# Altium PCB 000169(Quick_Fire_TK_USBC).PcbDoc
Units mm, origin at the board's own origin, x right, y up, seen from the top; angles counter-clockwise.
Board outline 42 x 17.54 mm, 2 copper layers (Top Layer, Bottom Layer), stack 1.571 mm thick; 15 components, 11 nets, 47 pads, 34 vias.
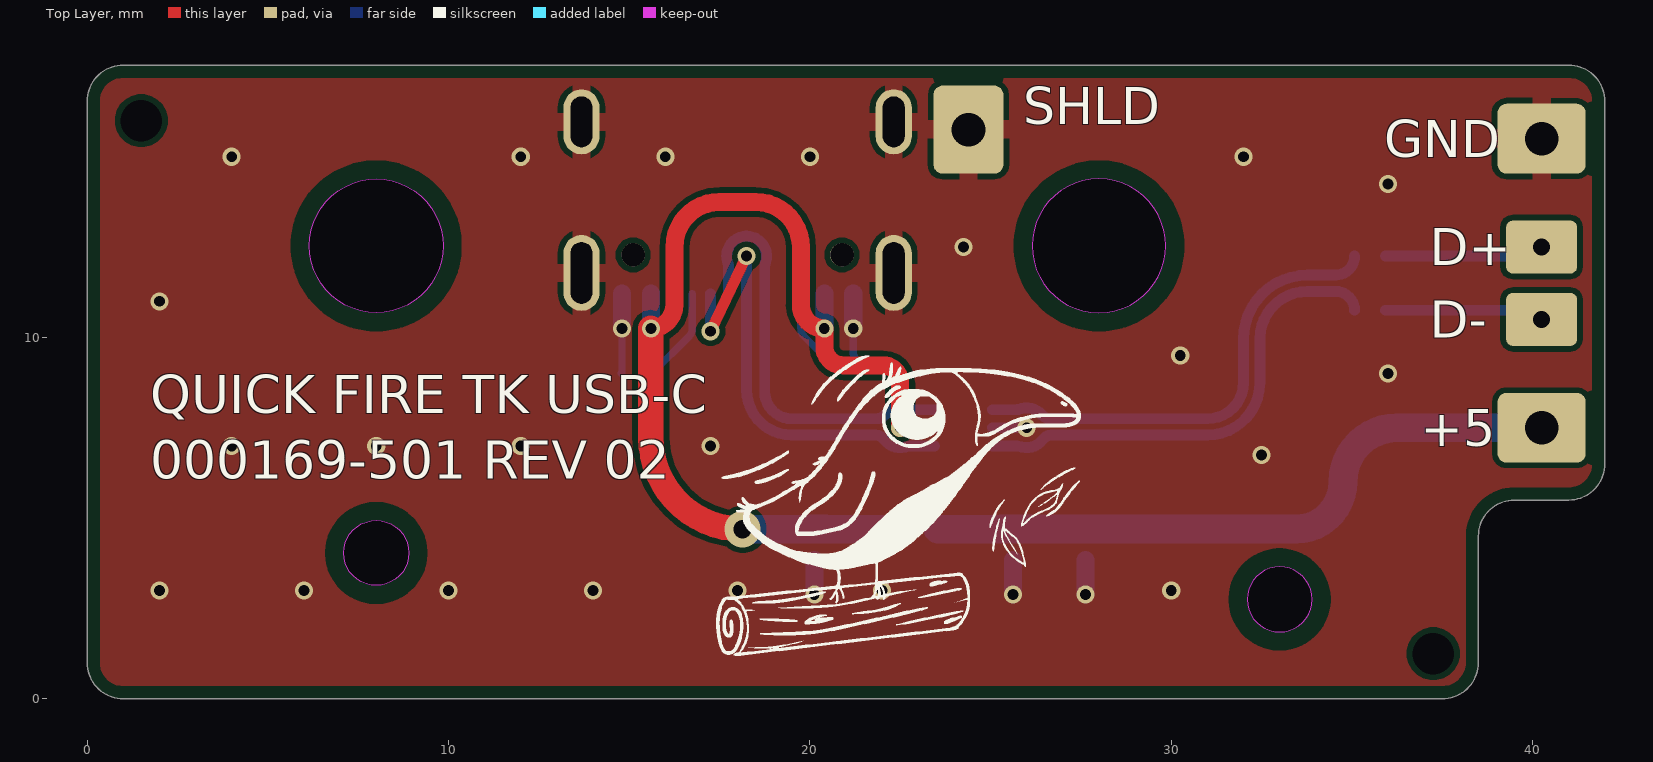
[diagram p0: Top Layer view]
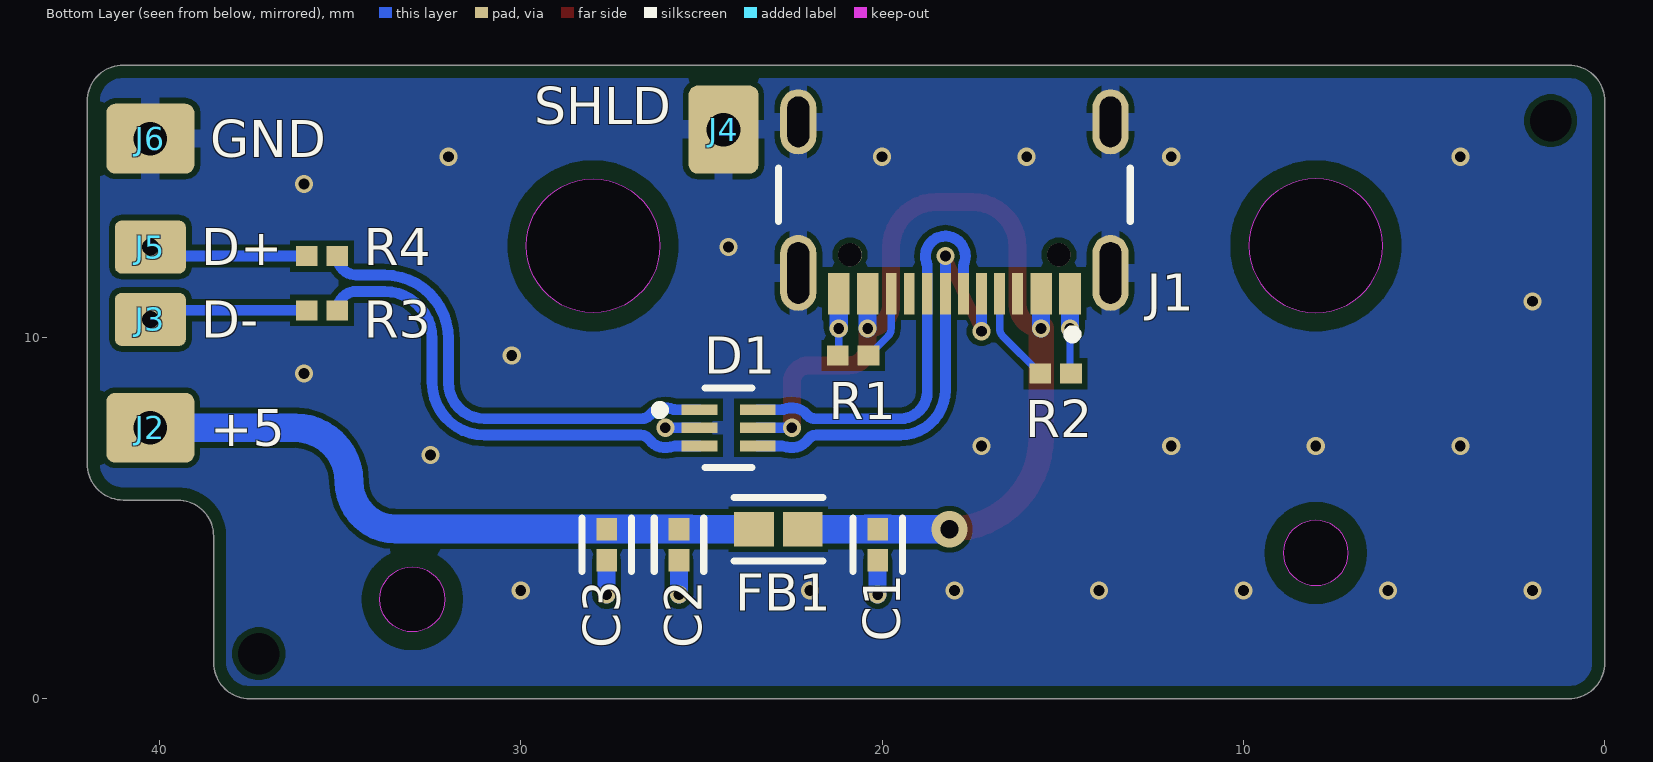
[diagram p1: Bottom Layer view, seen from below]
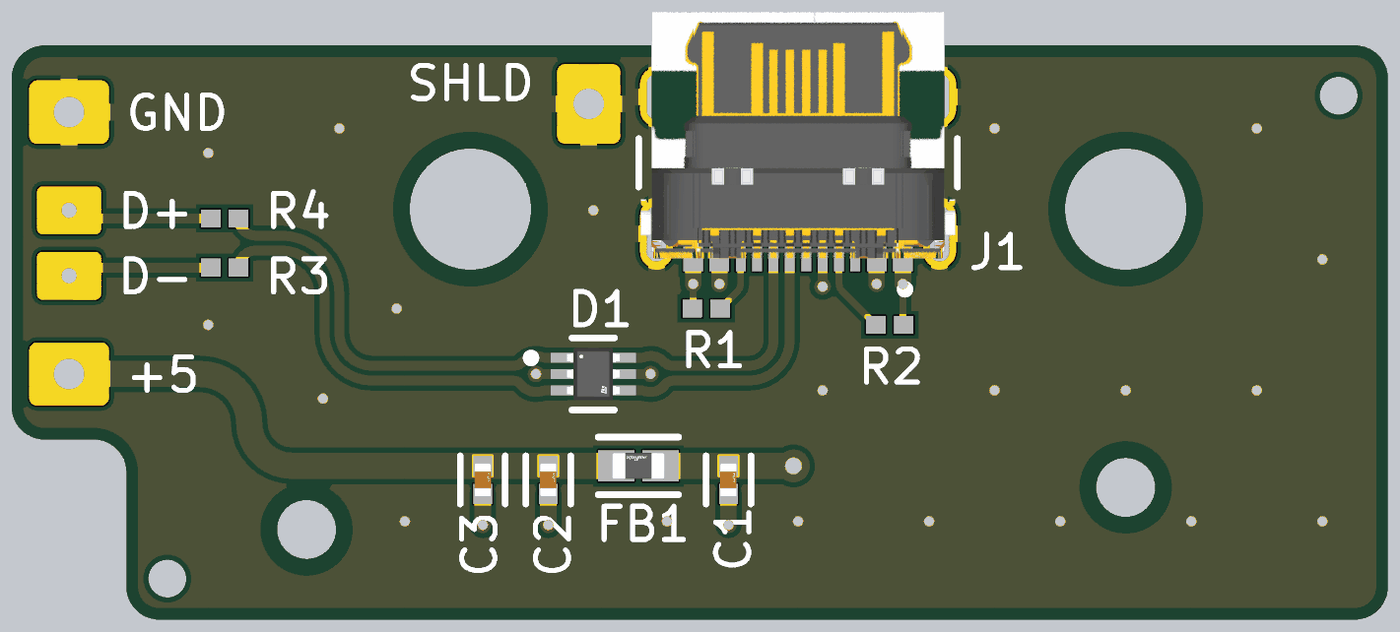
[diagram p2: 3D render of the assembled board from below, using the file's embedded part models]

## Layer stack, top to bottom
Top Solder: solder mask 0.0102, Solder Resist, Dk 3.5
Top Layer: signal copper 0.0356
Dielectric 1: dielectric 1.5, FR-4, Dk 4.5
Bottom Layer: signal copper 0.0356
Bottom Solder: solder mask 0.0102, Solder Resist, Dk 3.5

## Board outline
1,0 cw(c1,1) 0,1 0,16.535 cw(c1,16.535) 1,17.535 41,17.535 cw(c41,16.535) 42,16.535 42,6.5 cw(c41,6.5) 41,5.5 39.5,5.5 ccw(c39.5,4.5) 38.5,4.5 38.5,1 cw(c37.5,1) 37.5,0
cut-out: 32.1,2.75 ccw(c33,2.75) 33,1.85 ccw(c33,2.75) 33.9,2.75 ccw(c33,2.75) 33,3.65 ccw(c33,2.75)
cut-out: 8,3.135 cw(c8,4.035) 7.1,4.035 cw(c8,4.035) 8,4.935 cw(c8,4.035) 8.9,4.035 cw(c8,4.035)
cut-out: 26.15,12.535 ccw(c28,12.535) 28,10.685 ccw(c28,12.535) 29.85,12.535 ccw(c28,12.535) 28,14.385 ccw(c28,12.535)
cut-out: 8,10.685 cw(c8,12.535) 6.15,12.535 cw(c8,12.535) 8,14.385 cw(c8,12.535) 9.85,12.535 cw(c8,12.535)

## Design rules (kind name [scope] priority, off if disabled: settings)
BoardOutlineClearance [All] p1: gap=0.35 ignorepadtopadclearanceinfootprint=FALSE except(0.5: Arc-CutoutEdge Track-CutoutEdge SMDPad-CutoutEdge THPad-CutoutEdge Via-CutoutEdge Fill-CutoutEdge Poly-CutoutEdge Region-CutoutEdge Text-CutoutEdge)
Clearance Clearance_DP [All vs InNetClass('DP90')] p1: gap=0.152 ignorepadtopadclearanceinfootprint=TRUE
Clearance [All] p2: gap=0.152 ignorepadtopadclearanceinfootprint=FALSE
DiffPairsRouting [All] p1: maxlimit=0.152 minlimit=0.152 mostfreqgap=0.152 toplayer_minwidth=0.3 toplayer_maxwidth=0.3 toplayer_prefwidth=0.3 bottomlayer_minwidth=0.3 bottomlayer_maxwidth=0.3 bottomlayer_prefwidth=0.3 impedanceprofiledriven=TRUE impedanceprofileid={837F06F9-9FC5-4697-94FD-E73D30D62F6D} impedanceprofilevalue=90.000000 maxuncoupledlength=12.7
HoleSize [All] p1: absolutevalues=TRUE maxlimit=6.3 minlimit=0.2 maxpercent=80.000 minpercent=20.000
MinimumAnnularRing [All] p1: minimumring=0.076
MinimumSolderMaskSliver [All] p1: minsoldermaskwidth=0.1
PolygonConnect PolygonConnect_1 [All] p1: connectstyle=Direct reliefconductorwidth=0.508 reliefentries=4 polygonreliefangle="90 Angle" airgapwidth=0.254
RoomDefinition TopLevel [InComponentClass('TopLevel')] p1 off: confinementstyle=ConfineIn formatcopy=TRUE lockcomponents=FALSE outline -110,-117 -59.2,-117 -59.2,-91.6 -110,-91.6
RoutingCorners [All] p1: cornerstyle=Round minsetback=2.54 maxsetback=2.54
RoutingVias [All] p1: holewidth=0.5 width=1 viastyle="Through Hole" minholewidth=0.3 minwidth=0.5 maxholewidth=1 maxwidth=2
SilkToSilkClearance [All] p1: silktosilkclearance=0.1
SilkToSolderMaskClearance [IsPad] p1: minsilkscreentomaskgap=0.15 clearancetoexposedcopper=TRUE
SolderMaskExpansion [All] p1: expansion=0.05 istentingtop=FALSE
Width [All] p1: maxlimit=2.54 minlimit=0.089 preferedwidth=0.381
24 further rules are at their usual default settings.

## Classes and differential pairs
net class DP90: D_N D_P ESD_USB_N ESD_USB_P USB_N USB_P
differential pair USB: +USB_P -USB_N
differential pair ESD_USB: +ESD_USB_P -ESD_USB_N
differential pair D: +D_P -D_N

## Components (designator, comment, footprint, x,y, rotation, side; value= is the part's Value field where it differs from the comment)
C1 "GRT155R71H104KE01D" FP-GRT155-0_05-IPC_B 20.123,4.264 r90 bottom value=100nF
C2 "GRT155R71H104KE01D" FP-GRT155-0_05-IPC_B 25.623,4.264 r90 bottom value=100nF
C3 "GRT155R71H152KE01D" FP-GRT155-0_05-IPC_B 27.623,4.264 r90 bottom value=1.5nF
D1 "USBLC6-2P6" FP-SOT-666-MFG 24.25,7.5 r180 bottom
FB1 "BLM18PG221SN1D" FP-BLM18-0_15-t0_8-IPC_B 22.873,4.693 r0 bottom
J1 "USB4105-GF-A" FP-USB4105-GF-A-MFG 18,14.8 r0 bottom locked
J2 "20AWG_WTB_TH" 20AWG_WTB_TH 40.25,7.5 r270 bottom
J3 "26AWG_WTB_TH" 26AWG_WTB_TH 40.25,10.5 r270 bottom
J4 "20AWG_WTB_TH" 20AWG_WTB_TH 24.388,15.75 r180 bottom
J5 "26AWG_WTB_TH" 26AWG_WTB_TH 40.25,12.5 r270 bottom
J6 "20AWG_WTB_TH" 20AWG_WTB_TH 40.25,15.5 r270 bottom
R1 "RC0402JR-075K1L" RESC1005X40X25NL05T10 20.8,9.5 r180 bottom value=5.1k
R2 "RC0402JR-075K1L" RESC1005X40X25NL05T10 15.2,9 r0 bottom value=5.1k
R3 "RC0402FR-0722RL" RESC1005X40X25NL05T10 35.5,10.75 r0 bottom value=22R
R4 "RC0402FR-0722RL" RESC1005X40X25NL05T10 35.5,12.25 r0 bottom value=22R

## Footprints (in the part's own frame and the unit in brackets; to place one, negate y for a bottom-side part, rotate by r counter-clockwise, add the part's x,y. Pads: shape width x height; smd on the part's side, far side on the other; paste and mask are expansions set on the pad)
20AWG_WTB_TH [mm] "20AWG Wire to Board Through Hole / Hole Diameter is 15% larger than conductor diameter"
  rrect25% 1.934x2.434 hole 0.934 paste-2539.97: 1(0,0)
26AWG_WTB_TH [mm] "26AWG Wire to Board Through Hole / Hole Diameter is 15% larger than conductor diameter"
  rrect25% 1.466x1.966 hole 0.466 paste-2539.97: 1(0,0)
FP-BLM18-0_15-t0_8-IPC_B [mm]
  rect 1.106x0.958 smd paste+0: 1(-0.676,0) 2(0.676,0)
  silkscreen extent -1.23,-0.88 1.23,0.88, body extent -0.8,-0.4 0.8,0.4, height 0.95
FP-GRT155-0_05-IPC_B [mm]
  rect 0.615x0.572 smd paste+0: 1(-0.429,0) 2(0.429,0)
  silkscreen extent -0.74,-0.69 0.74,0.69, body extent -0.5,-0.25 0.5,0.25, height 0.55
FP-SOT-666-MFG [mm]
  rect 0.99x0.3 smd paste+0 mask+0: 1(-0.805,0.5) 2(-0.805,0) 3(-0.805,-0.5) 4(0.805,-0.5) 5(0.805,0) 6(0.805,0.5)
  silkscreen extent -2.02,-1.1 0.65,1.1, body extent -0.8,-0.8 0.8,0.8, height 0.6
FP-USB4105-GF-A-MFG [mm]
  rrect100% 1x2.1 hole 1.7 slot 0.6 at 0 deg paste-2539.97: 1(-4.32,3.015) 2(4.32,3.015)
  rrect100% 1x1.8 hole 1.4 slot 0.6 at 0 deg paste-2539.97: 3(-4.32,-1.165) 4(4.32,-1.165)
  rect 0.6x1.15 smd paste+0: A1-B12(-3.2,3.59) A4-B9(-2.4,3.59) B1-A12(3.2,3.59) B4-A9(2.4,3.59)
  rect 0.3x1.15 smd paste+0: A5(-1.25,3.59) A6(-0.25,3.59) A7(0.25,3.59) A8(1.25,3.59) B5(1.75,3.59) B6(0.75,3.59) B7(-0.75,3.59) B8(-1.75,3.59)
  round 0.65 hole 0.65 unplated paste-2539.97: ""(-2.89,2.515) ""(2.89,2.515)
  silkscreen extent -4.86,0.11 4.86,4.84, body extent -4.79,-3.76 4.79,3.77, height 3.26
RESC1005X40X25NL05T10 [mm] "Chip Resistor, 2-Leads, Body 1.00x0.50mm, IPC Medium Density"
  rect 0.6x0.55 smd: 1(-0.425,0) 2(0.425,0)
  body extent -0.53,-0.27 0.53,0.28, height 0.4

## Part data
C1 C2: library part CMP-06035-014200-1, "Multi-Layer Ceramic Capacitor 100nF 50V X7R ±10% 0402 Paper T/R", Manufacturer=Murata, Tolerance=10%, Voltage=50V, Part Number=GRT155R71H104KE01D
C3: library part CMP-06035-024210-1, "Multi-Layer Ceramic Capacitor 1.5nF 50V X7R ±10% 0402 Paper T/R", Manufacturer=Murata, Tolerance=10%, Voltage=50V, Part Number=GRT155R71H152KE01D
D1: library part CMP-12225-000058-1, "TVS DIODE 5.25V 17V SOT666", Breakdown Voltage=6V, Capacitance=3.5pF, Case/Package=SOT-666, Clamping Voltage=17V, Leakage Current=150nA, Max Operating Temperature=125°C, Min Operating Temperature=-40°C, Operating Supply Voltage=5V, Package Quantity=1, Peak Pulse Current=5A, Power Line Protection=Yes, Test Current=1mA, Contact Plating=Tin, Depth=1.3mm, Direction=Unidirectional, Element Configuration=Dual, ESD Protection=Yes, Height=0.6mm, Lead Free="Lead Free", Length=1.7mm, Max Breakdown Voltage=6V, Max Reverse Leakage Current=150nA, Min Breakdown Voltage=6V, Mount="Surface Mount", Number of Bidirectional Channels=2, Number of Channels=2, Number of Elements=1, Number of Pins=6, Packaging="Tape and Reel", Polarity=Unidirectional, Radiation Hardening=No, REACH SVHC="No SVHC", Reverse Breakdown Voltage=6V, Reverse Standoff Voltage=5V, Termination=SMD/SMT, Width=1.3mm, Working Voltage=5V
FB1: library part CMP-0686-00569-3, "Chip Ferrite Bead, 0603, 220Ω @ 100MHz, 0.1Ω, 25%, 1.4A", Case Code (Imperial)=0603, Case Code (Metric)=1608, Current Rating=1.4A, DC Resistance (DCR)=100mR, ESR (Equivalent Series Resistance)=220R@100MHz, Manufacturer Series=BLM18P, Max Operating Temperature=125°C, Min Operating Temperature=-55°C, Package Quantity=1, Test Frequency=100MHz, Tolerance=25%, Case/Package=0603, Core Material=Ferrite, DC Current=1.4A, DC Resistance-Max=100mR, Depth=0.8mm, Height=0.8mm, Impedance=220R, Lead Free="Lead Free", Length=1.6mm, Material=Steel, Max Current Rating=1.4A, Max DC Current=1.4A, Number of Circuits=1, Number of Functions=1, Number of Lines=1, Number of Pins=2, Packaging="Tape and Reel", Radiation Hardening=No, REACH SVHC="No SVHC", Resistance=100mR, RoHS Compliant=Yes, Series=BLM18P, Shielding=Unshielded, Termination=SMD/SMT, Weight=7.1E-05oz, Width=0.8mm
J1: library part CMP-245163-000001-1, "CONN RCPT USB2.0 TYPEC 5A", Current Rating=5/6.25/1.25/0.25A, Manufacturer=GCT, Package=0, Temperature="-40°C to +85°C", Temperature Range High=+85°C, Temperature Range Low=-40°C, Voltage Rating=20V, Automotive=No, Category=Conn, ComponentLink2Description=Datasheet, ComponentLink2URL=https://gct.co/files/drawings/usb4105.pdf, Conn Orientation="Right Angle", Contact Material=Gold,Nickel, Device Class L1=Connectors, Device Class L2="USB Connectors", Device Class L3=unset, Digikey Description="CONN RCPT USB2.0 TYPEC 5A", Height=3.46mm, Is Female=yes, Lead Free=Yes, Manufacturer Part Number=USB4105-GF-A, Number Of Contacts=16, Octopart=https://octopart.com/usb4105-gf-a-gct-106627878, RoHS=TRUE, Usb Standard="USB 2.0"
J2 J4 J6: "20AWG Wire to Board Through Hole"
J3 J5: "26AWG Wire to Board Through Hole"
R1 R2: library part CMP-2002-08025-1, "Thick Film Resistors - SMD 5.1 kOhms 62.5mW 0402 5%", Manufacturer="Yageo / Phycomp", Tolerance=5%, Part Number=RC0402JR-075K1L
R3 R4: library part CMP-2002-07520-1, "Thick Film Resistors 22 Ohms 62.5mW 0402 1%", Manufacturer="Yageo / Phycomp", Tolerance=1%, Part Number=RC0402FR-0722RL

## Free pads (board coordinates)
  round 0 hole 1.152 unplated paste+1.152 mask+0.074: 2(1.5,16) 2(37.25,1.25)

## Via types
v1: diameter 0.5, hole 0.3, Top Layer to Bottom Layer, tented both sides, 33 vias
v2: diameter 1, hole 0.5, Top Layer to Bottom Layer, tented both sides, 1 vias

## Nets (pads, with @x,y where several pads share a name; then routed paths per layer and width w, separated by ;. In a path a pad name is that pad's centre, name@x,y a point inside that pad or via, vN(x,y) a via of type N, cw(c..) or ccw(c..) an arc to the next point about the centre after c; other vN are vias at no path point)
CC1: J1.A5 R2.2 | length 2.7
  Bottom Layer w0.203: R2.2 16.662,10.037 ccw(c16.448,10.25) 16.75,10.25 J1.A5
CC2: J1.B5 R1.2 | length 2
  Bottom Layer w0.203: J1.B5 19.75,10.25 ccw(c20.052,10.25) 19.838,10.037 R1.2
D_N: J3.1 R3.2 | length 4.5
  Bottom Layer w0.3: R3.2 40,10.75 cw(c40,10.5) J3.1
D_P: J5.1 R4.2 | length 4.5
  Bottom Layer w0.3: R4.2 40,12.25 ccw(c40,12.5) J5.1
ESD_USB_N: D1.3 R3.1 | length 13.2
  Bottom Layer w0.3: D1.3 25.728,7 25.86,6.966 ccw(c26,7.5) 26.447,7.175 cw(c26.689,6.998) 26.687,7.298 31,7.298 ccw(c31,8.75) 32.452,8.75 32.452,9.952 cw(c33.774,9.952) 33.774,11.274 34.551,11.274 cw(c34.551,10.75) R3.1
ESD_USB_P: D1.1 R4.1 | length 13.2
  Bottom Layer w0.3: D1.1 25.728,8 ccw(c25.728,8.3) 25.772,8.003 cw(c26,7.5) 26.422,7.856 ccw(c26.651,8.05) 26.65,7.75 31,7.75 ccw(c31,8.75) 32,8.75 32,9.952 cw(c33.774,9.952) 33.774,11.726 34.551,11.726 ccw(c34.551,12.25) R4.1
GND: C1.1 C2.1 C3.1 D1.2 J1.1 J1.2 J1.3 J1.4 J1.A1-B12 J1.B1-A12 J4.1 J6.1 R1.1 R2.1 | length 7.7
  Bottom Layer w0.203: R2.1 ccw(c14.715,9.06) 14.8,9.06 v1(14.8,10.25) ; v1(21.2,10.25) 21.2,9.56 ccw(c21.285,9.56) R1.1
  Bottom Layer w0.3: D1.2 v1(26,7.5)
  Bottom Layer w0.5: v1(14.8,10.25) J1.A1-B12 ; v1(20.123,2.89) C1.1 ; v1(21.2,10.25) J1.B1-A12 ; v1(25.623,2.89) C2.1 ; v1(27.623,2.89) C3.1
  other v1: 2,3 6,3 10,3 14,3 18,3 22,3 30,3 32.5,6.75 4,7 8,7 12,7 17.25,7 36,9 30.25,9.5 2,11 24.25,12.5 36,14.25 4,15 12,15 16,15 20,15 32,15
USB_N: D1.4 J1.A7 J1.B7 | length 13.1
  Top Layer w0.3: v1(17.25,10.17) v1(18.25,12.25)
  Bottom Layer w0.3: v1(17.25,10.17) J1.B7 ; v1(18.25,12.25) J1.A7 18.25,8.548 ccw(c19.5,8.548) 19.5,7.298 21.813,7.298 cw(c21.811,6.998) 22.053,7.175 ccw(c22.5,7.5) 22.64,6.966 22.772,7 D1.4
USB_P: D1.6 J1.A6 J1.B6 | length 11.8
  Bottom Layer w0.3: J1.A6 17.75,11.956 ccw(c17.45,11.956) 17.731,12.06 cw(c18.25,12.25) 17.698,12.25 cw(c18.25,12.25) 18.776,12.082 18.75,12 J1.B6 18.75,8.5 ccw(c19.5,8.5) 19.5,7.75 21.85,7.75 ccw(c21.849,8.05) 22.078,7.856 cw(c22.5,7.5) 22.728,8.003 ccw(c22.772,8.3) 22.772,8 D1.6
VBUS: C1.2 D1.5 FB1.1 J1.A4-B9 J1.B4-A9 | length 28.5
  Top Layer w0.5: v1(15.6,10.25) ccw(c15.6,10.9) 16.25,10.9 16.25,12.5 cw(c17.5,12.5) 17.5,13.75 18.5,13.75 cw(c18.5,12.5) 19.75,12.5 19.75,10.9 ccw(c20.4,10.9) v1(20.4,10.25) 20.4,9.75 ccw(c20.925,9.75) 20.925,9.225 22.025,9.225 cw(c22.025,8.75) 22.5,8.75 v1(22.5,7.5)
  Top Layer w0.7: v1(15.6,10.25) 15.6,7.233 ccw(c18.14,7.233) v2(18.14,4.693)
  Bottom Layer w0.3: v1(22.5,7.5) D1.5
  Bottom Layer w0.5: v1(15.6,10.25) J1.A4-B9 ; v1(20.4,10.25) J1.B4-A9
  Bottom Layer w0.8: v2(18.14,4.693) 19.78,4.693 cw(c19.837,4.143) 19.837,4.695 20.409,4.695 cw(c20.409,4.143) 20.466,4.693 FB1.1
VBUS_FLT: C2.2 C3.2 FB1.2 J2.1 | length 18.3
  Bottom Layer w0.8: FB1.2 25.25,4.693 ccw(c25.248,5.493) 25.299,4.694 cw(c25.337,4.143) 25.337,4.695 33.445,4.695 ccw(c33.445,6) 34.75,6 cw(c36.25,6) 36.25,7.5 J2.1
pads on no net: J1. J1.A8 J1.B8

## Polygon pours and split planes (outlines as drawn)
GND on Bottom Layer "L2_GND" (solid, pour order 4): 0,0 0,16.535 cw(c1,16.535) 1,17.535 41,17.535 cw(c41,16.535) 42,16.535 42,6.5 cw(c41,6.5) 41,5.5 39.5,5.5 ccw(c39.5,4.5) 38.5,4.5 38.5,1 cw(c37.5,1) 37.5,0
GND on Top Layer "L1_GND" (solid, pour order 3): 0,0 0,16.535 cw(c1,16.535) 1,17.535 41,17.535 cw(c41,16.535) 42,16.535 42,6.5 cw(c41,6.5) 41,5.5 39.5,5.5 ccw(c39.5,4.5) 38.5,4.5 38.5,1 cw(c37.5,1) 37.5,0

## Silkscreen, mask and mechanical layers (free items; w line width, h text height)
Top Overlay:
  drawing of 26 lines, arcs and shapes, not listed
  text "SHLD" at 25.902,15.902 h1.02
  text "GND" at 35.889,14.992 h1.02
  text "D+" at 37.155,11.992 h1.02
  text "D-" at 37.155,9.992 h1.02
  text "+5" at 36.905,6.992 h1.02
  text "QUICK FIRE TK USB-C / 000169-501 REV 02" at 1.75,5.75 h1.8
Bottom Overlay:
  text "SHLD" at 29.627,15.902 h1.02
  text "GND" at 38.598,14.992 h1.02
  text "D+" at 38.848,11.992 h1.02
  text "D-" at 38.848,9.992 h1.02
  text "+5" at 38.598,6.992 h1.02
Mechanical 1:
  circle w0.013: c8,4.035 r0.9
  circle w0.013: c33,2.75 r0.9
  circle w0.013: c8,12.535 r1.85
  circle w0.013: c28,12.535 r1.85
  lines w0.013: 0,1 ccw(c1,1) 1,0 37.5,0 ccw(c37.5,1) 38.5,1 38.5,4.5 cw(c39.5,4.5) 39.5,5.5 41,5.5 ccw(c41,6.5) 42,6.5 42,16.535 ccw(c41,16.535) 41,17.535 1,17.535 ccw(c1,16.535) 0,16.535 0,1